# Altium PCB ELC0205.PcbDoc
Units mil, origin at the board's own origin, x right, y up, seen from the top; angles counter-clockwise.
Board outline 4000 x 2500 mil, 2 copper layers (Top Layer, Bottom Layer), stack 64.8 mil thick; 19 components, 7 nets, 28 pads, 0 vias.
Unrouted connection lines stored in the file: 1.
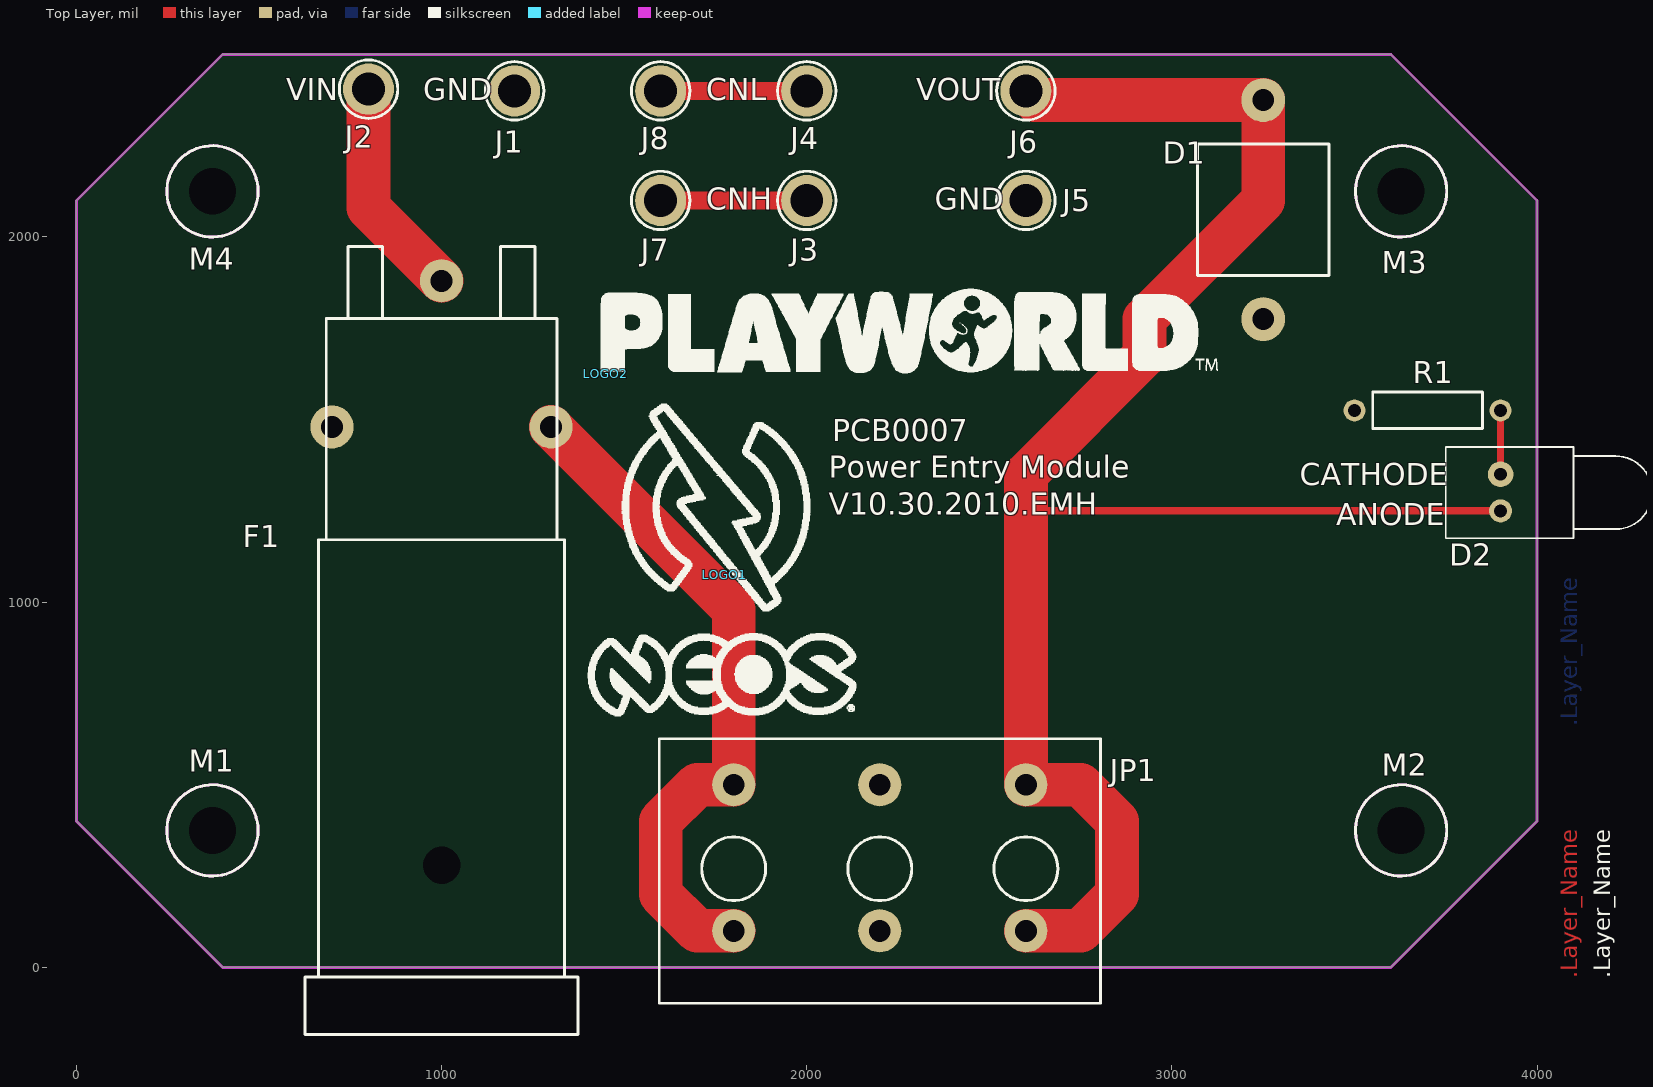
[diagram p0: Top Layer view]
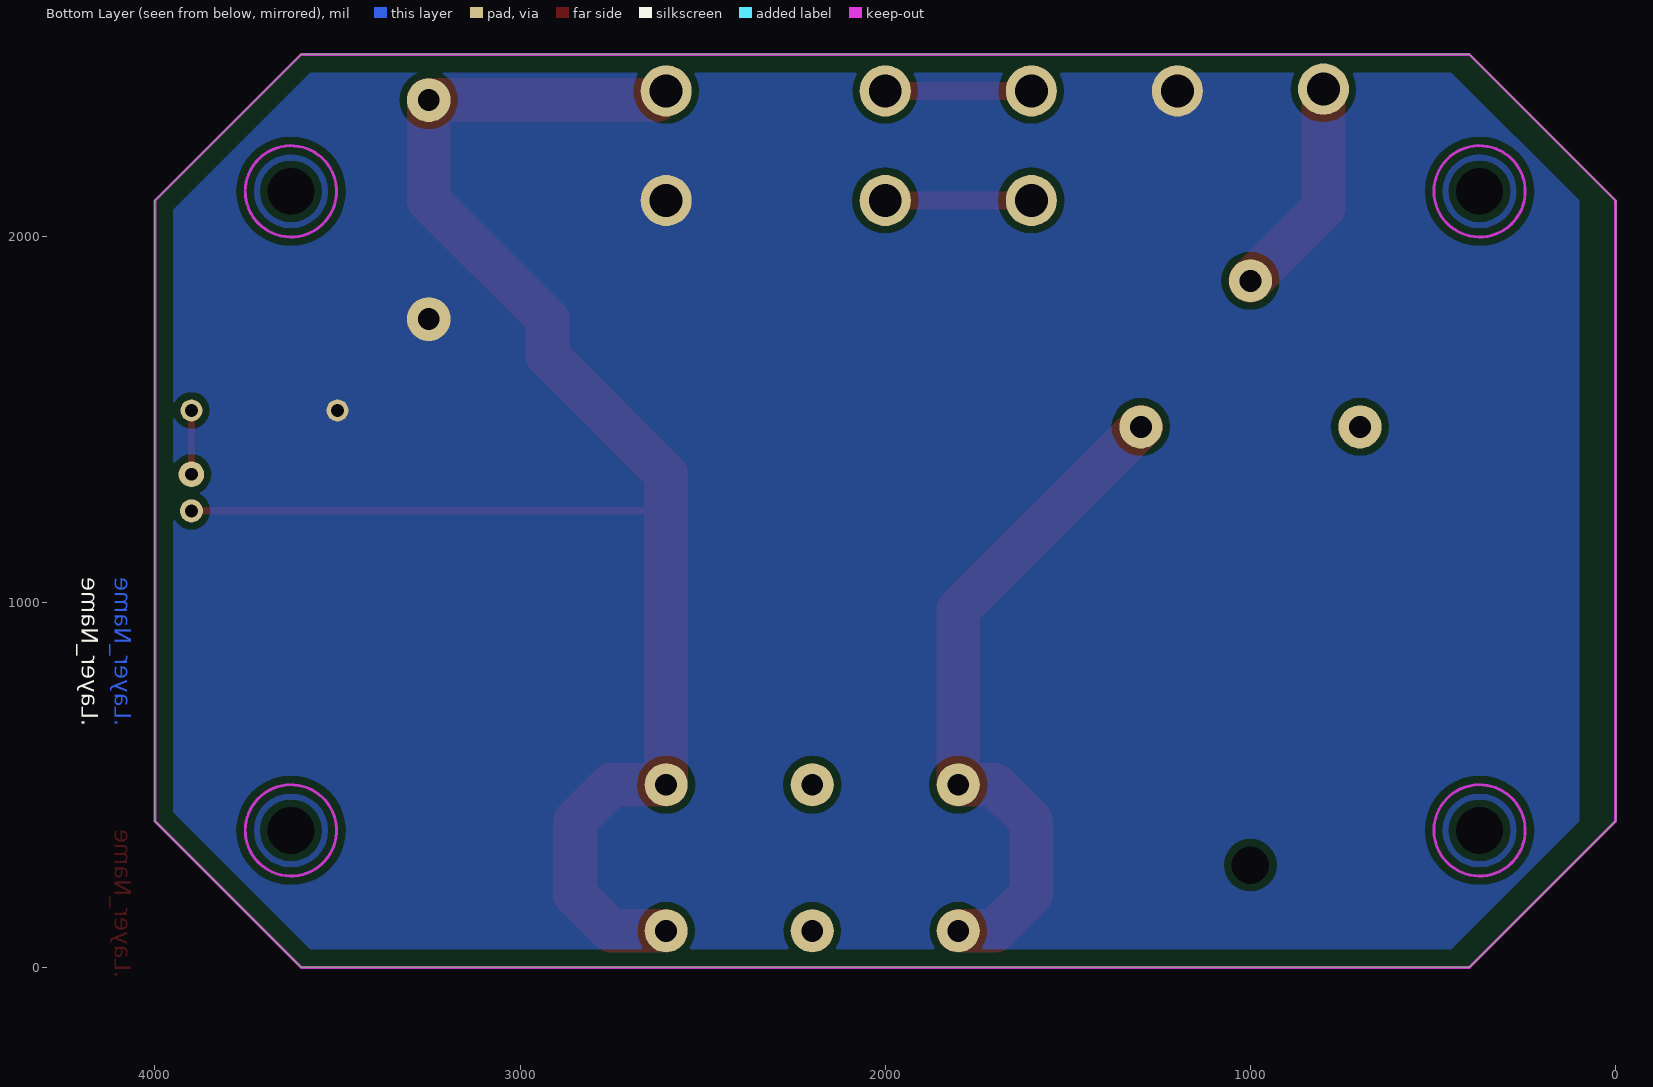
[diagram p1: Bottom Layer view, seen from below]

## Layer stack, top to bottom
Top Layer: signal copper 2.8
Dielectric: core 59.2, FR-4, Dk 4.8
Bottom Layer: signal copper 2.8

## Board outline
400,0 0,400 0,2100 400,2500 3600,2500 4000,2100 4000,400 3600,0

## Design rules (kind name [scope] priority, off if disabled: settings)
Clearance [All] p1: gap=20
ComponentClearance [All] p1: gap=0 collisioncheckmode=3 verticalgap=0 showdistances=FALSE
FabricationTestPointUsage TestPointUsage [All] p1: valid=0 allowmultiple=FALSE
FabricationTestpoint Testpoint [All] p1: side=3 testpointundercomponent=TRUE minsize=40 maxsize=100 preferedsize=60 minholesize=0 maxholesize=40 preferedholesize=32 testpointgrid=1 allowsidetop=TRUE allowsidebottom=TRUE usegrid=TRUE gridtolerance=0.01
Height [All] p1: minheight=0 maxheight=99999 prefheight=1000
PolygonConnect [All] p1: connectstyle=Direct reliefconductorwidth=30 reliefentries=4 polygonreliefangle="90 Angle"
RoutingVias [All] p1: holewidth=28 width=50 viastyle="Through Hole" minholewidth=28 minwidth=50 maxholewidth=28 maxwidth=50
SilkToSilkClearance [All] p1: silktosilkclearance=0
SilkscreenOverComponentPads [All] p1: minsilkscreentomaskgap=0
SolderMaskExpansion [All] p1: expansion=4
Width [All] p1: maxlimit=200 minlimit=10 preferedwidth=200
22 further rules are at their usual default settings.

## Components (designator, comment, footprint, x,y, rotation, side; value= is the part's Value field where it differs from the comment)
D1 "TVS" 15KP 3250,2075 r90 top
D2 "HLMP-3301-D00B2" LED-2 3900,1300 r0 top
F1 "30A Fuse Holder" "SCHURTER 0031.2500" 1000,280 r0 top
J1 "BAT-" WIRE_14GA 1200,2400 r0 top
J2 "BAT+" WIRE_14GA 800,2405 r0 top
J3 "CNH" WIRE_14GA 2000,2100 r0 top
J4 "CNL" WIRE_14GA 2000,2400 r0 top
J5 "BAT-" WIRE_14GA 2600,2100 r0 top
J6 "BAT+" WIRE_14GA 2600,2400 r0 top
J7 "CNH" WIRE_14GA 1600,2100 r0 top
J8 "CNL" WIRE_14GA 1600,2400 r0 top
JP1 "1929520" MKDS10 2200,500 r0 top
LOGO1 "NEOS_LOGO" NEOS_LOGO_0 1775,1075 r0 top
LOGO2 "NEOS_LOGO" FULL_LOGO_1 1450,1625 r0 top
M1 "Mounting Hole #4 Screw" MHole#4 372.5,375 r0 top locked
M2 "Mounting Hole #4 Screw" MHole#4 3627.5,375 r0 top locked
M3 "Mounting Hole #4 Screw" MHole#4 3627.5,2125 r0 top locked
M4 "Mounting Hole #4 Screw" MHole#4 372.5,2125 r0 top locked
R1 "1k" "R01M025 Axial 0.4" 3500,1525 r0 top

## Footprints (in the part's own frame and the unit in brackets; to place one, negate y for a bottom-side part, rotate by r counter-clockwise, add the part's x,y. Pads: shape width x height; smd on the part's side, far side on the other; paste and mask are expansions set on the pad)
15KP [mil] "15000W Axial Leaded Transient Voltage Suppressor"
  round 120 hole 60: 1(-300,0) 2(300,0)
  silkscreen extent -180,-180 180,180
FULL_LOGO_1 [mil]
  silkscreen extent -15,3 1675,233
LED-2 [mil] "Typical RED GaAs LED; 2 Leads"
  round 62.99 hole 35: 1(0,-50)
  round 70 hole 35: 2(0,50)
  silkscreen extent -150,-125 415,125
MHole#4 [mil] "Mounting Hole for #4 screw"
  round 0 hole 128 unplated: 0(0,0)
  Keep-Out Layer circle w8: c0,0 r125
  silkscreen extent -125,-125 125,125
MKDS10 [mm] "Phoenix Contact MKDS 10 52AMP a0.16mm pitch"
  round 3 hole 1.524: 1(-10.16,-10.16) 1(-10.16,0) 2(0,-10.16) 2(0,0) 3(10.16,-10.16) 3(10.16,0)
  silkscreen extent -15.34,-15.2 15.34,3.2
NEOS_LOGO_0 [mil]
  silkscreen extent -375,-386 361,468
"R01M025 Axial 0.4" [mil]
  round 60 hole 35: 1(0,0) 2(400,0)
  silkscreen extent 50,-50 350,50
"SCHURTER 0031.2500" [mm] "Schurter 30 AMP Shock Safe Horizontal"
  round 0 hole 2.6 unplated: 0(0,0)
  round 3 hole 1.524: 1(0,40.64) 2(-7.62,30.48) 2(7.62,30.48)
  silkscreen extent -9.5,-11.77 9.5,43.03
WIRE_14GA [mil] "Hole for 14GA stranded wire"
  round 140 hole 90: 1(0,0)
  silkscreen extent -80,-80 80,80

## Part data
D1: library part 15KP, "15000W Axial Leaded Transient Voltage Suppressor"
D2: library part LRDLN21RPHLP, "LED 5MM GAP RED RT ANGLE HOUSING"
F1: library part "Fuse 2", "Shock-Safe Fuseholder, 5 x 20 / 6.3 x 32 mm, Slot Knob, horizontal"
J1 J2 J3 J4 J5 J6 J7 J8: library part ~14GA_WIRE
JP1: library part "Header 3", "Fixed Terminal Blocks MKDSP 10 HV/ 3-10."
M1 M2 M3 M4: library part MountingHole_4
R1: library part R01M025, "Resistor 1/2W 1% Metal film"

## Nets (pads, with @x,y where several pads share a name; then routed paths per layer and width w, separated by ;. In a path a pad name is that pad's centre, name@x,y a point inside that pad or via, vN(x,y) a via of type N, cw(c..) or ccw(c..) an arc to the next point about the centre after c; other vN are vias at no path point)
+12V_IN: F1.1 J2.1 | length 607.8
  Top Layer w120: J2.1 800,2080 F1.1
+12V_OUT: D1.2 D2.1 J6.1 JP1.3 | length 4897.8
  Top Layer w20: 2600,1275 2625,1250 D2.1
  Top Layer w120: JP1.3@2600,100 2750,100 2850,200 2850,400 2750,500 2600,500 2600,1275 2600,1350 2925,1675 2925,1775 3250,2100 D1.2 2625,2375 J6.1
GND: D1.1 J1.1 J5.1 R1.1
NetD2_2: D2.2 R1.2 | length 175
  Top Layer w20: D2.2 R1.2
NetF1_2: F1.2 JP1.1 | length 1869.9
  Top Layer w120: F1.2@1300,1480 1800,980 1800,500 1700,500 1600,400 1600,200 1700,100 JP1.1@1800,100
NetJ3_1: J3.1 J7.1 | length 400
  Top Layer w50: J7.1 J3.1
NetJ4_1: J4.1 J8.1 | length 400
  Top Layer w50: J8.1 J4.1
pads on no net: F1.0 JP1.2 M1.0 M2.0 M3.0 M4.0

## Polygon pours and split planes (outlines as drawn)
GND on Bottom Layer "GND" (solid, pour order 1000): 100,2100 100,500 100,400 400,100 450,50 600,50 3575,50 3800,275 3950,425 3950,2050 3950,2075 3575,2450 2125,2450 450,2450 100,2100

## Keep-outs
Keep-Out Layer:
  the board outline again, w8

## Other copper
Top Layer:
  text ".Layer_Name" at 4110,-30 h45 r90
Bottom Layer:
  text ".Layer_Name" at 4110,660 h45 r90

## Silkscreen, mask and mechanical layers (free items; w line width, h text height)
Top Overlay:
  text "VIN" at 575,2375 h60
  text "GND" at 950,2375 h60
  text "CNL" at 1725,2375 h60
  text "VOUT" at 2300,2375 h60
  text "CNH" at 1725,2075 h60
  text "GND" at 2350,2075 h60
  text "PCB0007" at 2070,1440 h60
  text "Power Entry Module" at 2060,1340 h60
  text "CATHODE" at 3350,1320 h60
  text "V10.30.2010.EMH" at 2060,1240 h60
  text "ANODE" at 3450,1210 h60
  text ".Layer_Name" at 4200,-30 h45 r90
Bottom Overlay:
  text ".Layer_Name" at 4200,660 h45 r90
Board Outline:
  the board outline again, w8
Dimesions:
  text ".Layer_Name" at 4290,-30 h45 r90
Notes:
  lines w12: 4975,1655 7075,1655
  text "NOTES:  UNLESS OTHERWISE SPECIFIED" at 5050,1705 h62.5
  text "1." at 4855,1495 h50
  text "MAT'L: FR-406 ROHS COMPLiANT, .062 THK." at 5005,1495 h50
  text "2." at 4855,1370 h50
  text "TOP AND BOTTOM LAYER - 2 OZ COPPER AFTER PLATING." at 5005,1370 h50
  text "4." at 4855,1245 h50
  text "FINISH: GOLD FLASH OVER ALL EXPOSED COPPER" at 5005,1245 h50
  text "5." at 4855,1120 h50
  text "ALL HOLES ARE PLATED THRU W/ MIN .001 (1 OZ) COPPER." at 5005,1120 h50
  text "6." at 4855,995 h50
  text "ALL DIMENSIONS ARE FINISHED DIMENSIONS:" at 5005,995 h50
  text ".XXX = +/- .005  .XX = +/- .01  HOLE DIA = +/- .003." at 5005,870 h50
  text "7." at 4855,745 h50
  text "VENDOR'S UL APPROVAL MARK MUST BE ON BOARD, 94V-0." at 5005,745 h50
  text ".Layer_Name" at 4320,650 h45 r90
  text "WEEK & YEAR OF FABRICATION TO BE STAMPED ON BOARD." at 5005,620 h50
  text "8." at 4855,495 h50
  text "SOLDERMASK BOTH SIDES OF BOARD. L.P.I. OVER BARE COPPER, RED" at 5005,495 h50
  text "9." at 4855,370 h50
  text "SILKSCREEN TOP SIDE W/ YELLOW EPOXY INK, OVER SOLDERMASK." at 5005,370 h50
  text "10." at 4855,245 h50
  text "LAYER STACK - TOP, BOTTOM" at 5005,245 h50
Drill Drawing:
  text ".Layer_Name" at 4350,1350 h45 r90

## Dimensions
4000,2100 to 0,2100 on Dimesions
4000,2100 to 3627.5,2125 on Dimesions
3600,2500 to 4000,400 on Dimesions
372.5,2125 to 0,2100 on Dimesions
0,2100 to 400,2500 on Dimesions
400,2500 to 0,2100 on Dimesions
372.5,2125 to 400,2500 on Dimesions
400,0 to 0,400 on Dimesions
400,0 to 372.5,375 on Dimesions
400,0 to 400,2500 on Dimesions
372.5,375 to 372.5,2125 on Dimesions
372.5,2125 to 3627.5,2125 on Dimesions